# Altium PCB PCB.PcbDoc
Units mil, origin at the board's own origin, x right, y up, seen from the top; angles counter-clockwise.
Board outline 2838.9 x 750 mil, 2 copper layers (Top Layer, Bottom Layer), stack 55.118 mil thick; 18 components, 20 nets, 97 pads, 46 vias.
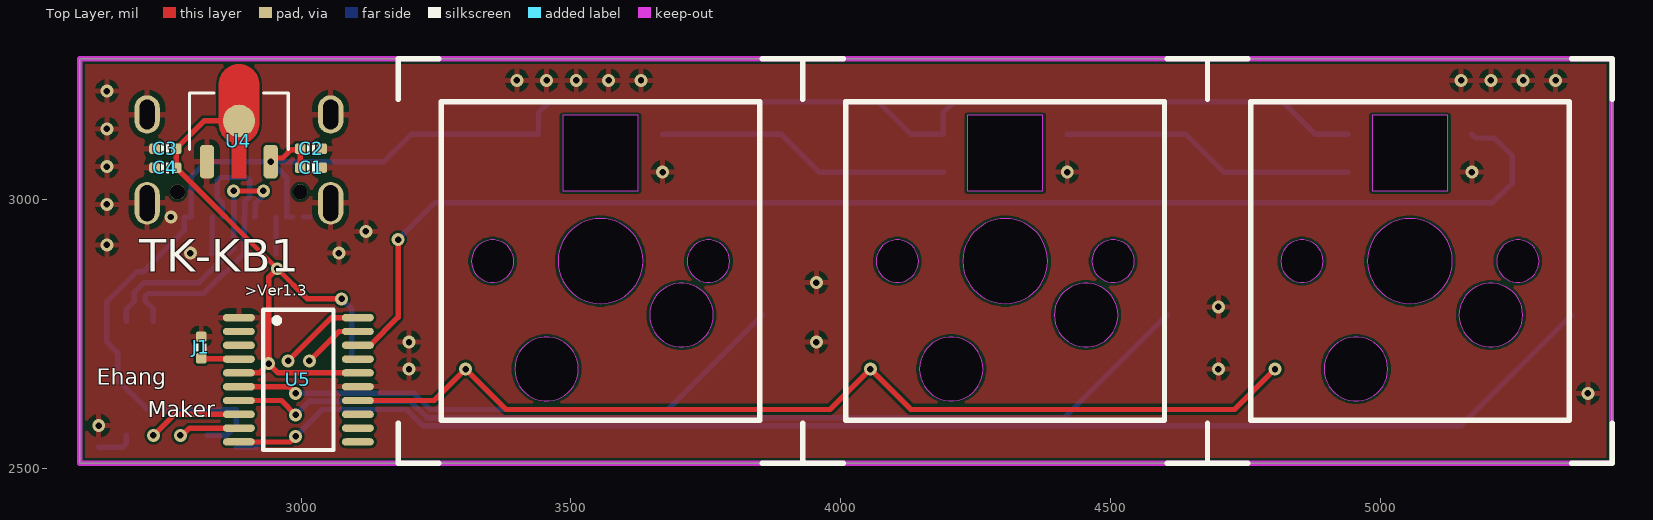
[diagram p0: Top Layer view]
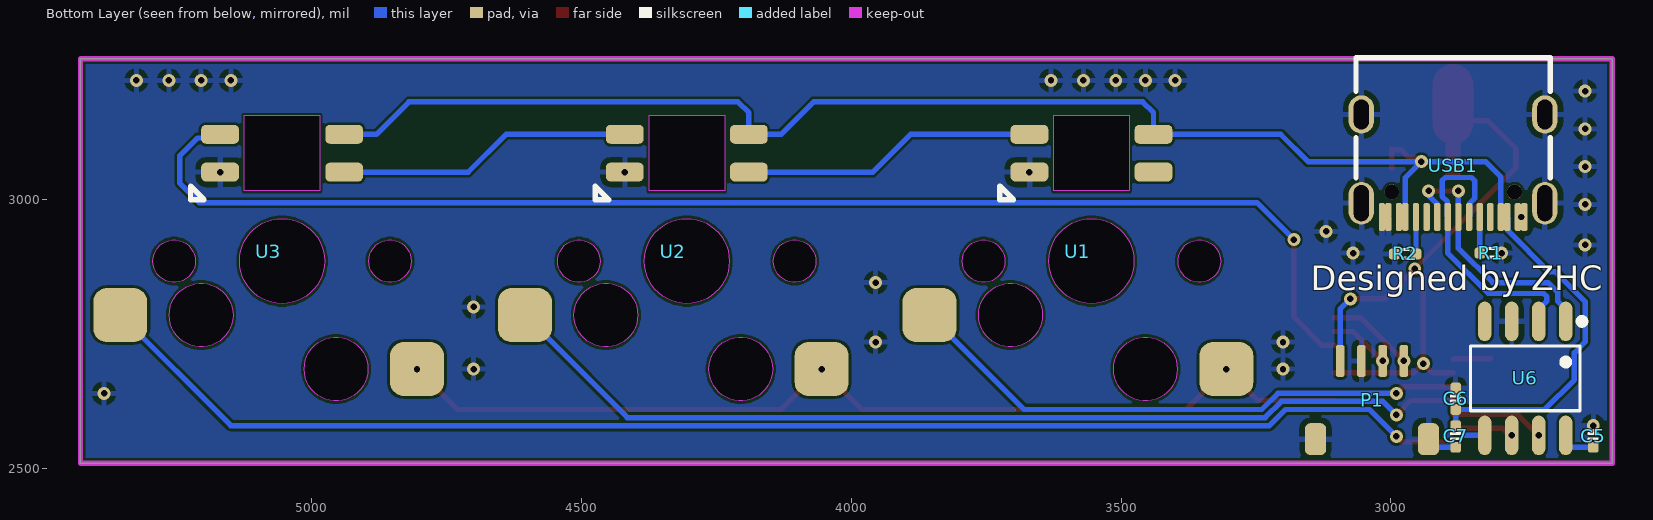
[diagram p1: Bottom Layer view, seen from below]
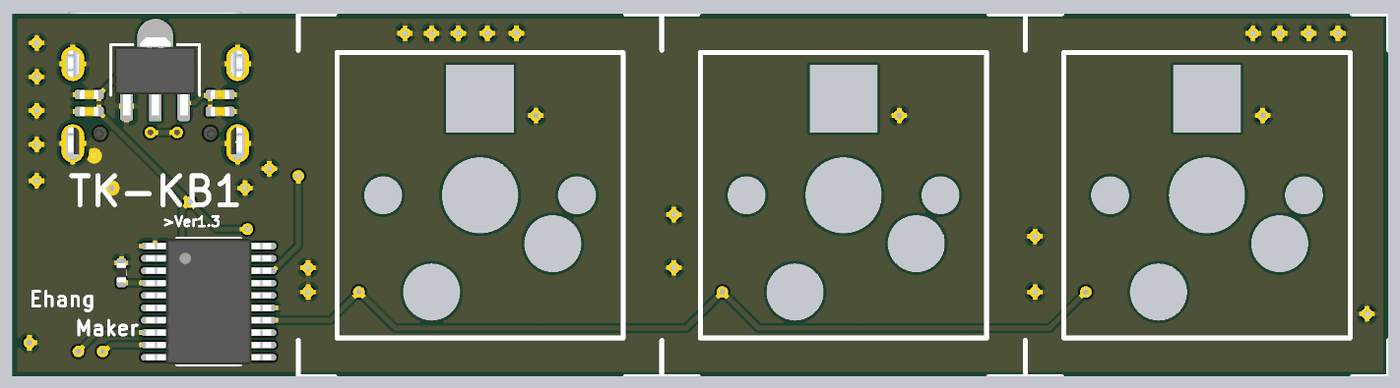
[diagram p2: 3D render of the assembled board from above, using the file's embedded part models]
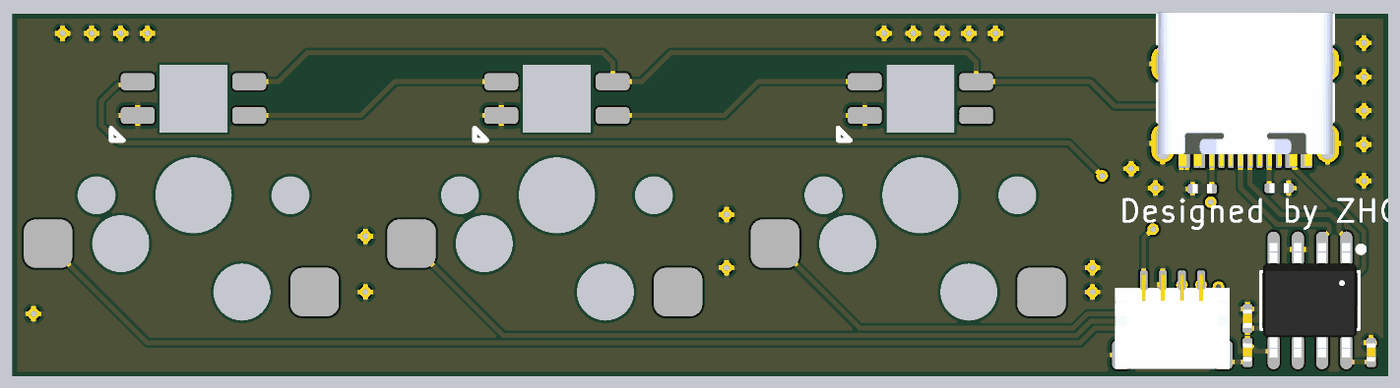
[diagram p3: 3D render of the assembled board from below, using the file's embedded part models]

## Layer stack, top to bottom
Top Solder: solder mask 3.937, Solder Resist, Dk 3.5
Top Layer: signal copper 7.874
Dielectric 1: dielectric 39.3701, FR-4, Dk 4.8
Bottom Layer: signal copper 7.874
Bottom Solder: solder mask 3.937, Solder Resist, Dk 3.5

## Board outline
2589.85,2810 2589.85,3260.15 5428.75,3260.15 5428.75,2510.15 2589.85,2510.15

## Design rules (kind name [scope] priority, off if disabled: settings)
Clearance [All] p1: gap=5 ignorepadtopadclearanceinfootprint=FALSE
DiffPairsRouting [All] p1: maxlimit=10 minlimit=5 mostfreqgap=10 toplayer_minwidth=5 toplayer_maxwidth=15 toplayer_prefwidth=15 bottomlayer_minwidth=5 bottomlayer_maxwidth=15 bottomlayer_prefwidth=15 maxuncoupledlength=500
HoleToHoleClearance [All] p1: gap=5 allowstackedmicrovias=TRUE
MinimumSolderMaskSliver [All] p1: minsoldermaskwidth=5
PolygonConnect [All] p1: connectstyle=Relief reliefconductorwidth=10 reliefentries=4 polygonreliefangle="90 Angle" airgapwidth=10
RoutingVias [All] p1: holewidth=12 width=24 viastyle="Through Hole" minholewidth=12 minwidth=24 maxholewidth=28 maxwidth=50
SilkToSilkClearance [All] p1: silktosilkclearance=5
SilkToSolderMaskClearance [IsPad] p1: minsilkscreentomaskgap=5 clearancetoexposedcopper=TRUE
SolderMaskExpansion [All] p1: expansion=4 istentingtop=FALSE
Width PWR [All] p1: maxlimit=10 minlimit=10 preferedwidth=10
Width [All] p2: maxlimit=10 minlimit=5 preferedwidth=5 minimp=50.000000 maximp=50.000000 favimp=50.000000
25 further rules are at their usual default settings.

## Classes and differential pairs
differential pair USB: +USB_P -USB_N

## Components (designator, comment, footprint, x,y, rotation, side; value= is the part's Value field where it differs from the comment)
C1 "10uF" C0402 3018.48,3058.22 r0 top
C2 "100nF" C0402 3018.48,3093.22 r0 top
C3 "100nF" C0402 2748.48,3093.22 r0 top
C4 "10uF" C0402 2748.48,3058.22 r0 top
C5 "100nF" C0402 2625,2560 r90 bottom
C6 "10uF" C0402 2880,2630 r90 bottom
C7 "100nF" C0402 2880,2560 r270 bottom
J1 "Jumper" R0402 2815,2725 r90 top
P1 "SH1.0-4P" SH1.0-4P 3035,2700 r180 bottom
R1 "5.1KΩ" R0402 2815,2900 r0 bottom
R2 "5.1KΩ" R0402 2973.48,2898.22 r0 bottom
U1 "KaiHua BOX" 凯华轴座+3528反贴灯 3555,2885 r0 top
U2 "KaiHua BOX" 凯华轴座+3528反贴灯 4305,2885 r0 top
U3 "KaiHua BOX" 凯华轴座+3528反贴灯 5055,2885 r0 top
U4 "AMS1117-3.3" SOT-89 2883.03,3145 r270 top
U5 "STM32F030F6/STM32F042F6" TSSOP-20 2995,2665 r0 top
U6 "CH340N" SOP-8 2750,2665 r0 bottom
USB1 "TYPE-C-16P" "TYPE-C-KH Female_LieDown_16P" 2886.16,3116.85 r0 bottom

## Footprints (in the part's own frame and the unit in brackets; to place one, negate y for a bottom-side part, rotate by r counter-clockwise, add the part's x,y. Pads: shape width x height; smd on the part's side, far side on the other; paste and mask are expansions set on the pad)
C0402 [mil] "电容-0402"
  rrect50% 20x20 smd: 1(-20,0) 2(20,0)
  silkscreen extent -6,-9 6,9, body extent -20,-10 20,10, height 20
R0402 [mil] "电阻-0402"
  rrect50% 20x20 smd: 1(-20,0) 2(20,0)
  silkscreen extent -7,-10 7,10, body extent -20,-10 20,10, height 14
SH1.0-4P [mm]
  rrect50% 0.4x1.5 smd: 1(-1.5,0) 2(-0.5,0) 3(0.5,0) 4(1.5,0)
  rrect50% 1x1.5 smd: SH1(-2.659,-3.683) SH2(2.659,-3.683)
  body extent -3,-4.42 3,0.54, height 3.14
SOP-8 [mm]
  oval 0.63x1.865 smd: 1(-1.877,-2.751) 2(-0.607,-2.751) 3(0.663,-2.751) 4(1.933,-2.751) 5(1.933,2.614) 6(0.663,2.614) 7(-0.607,2.614) 8(-1.877,2.614)
  silkscreen extent -2.79,-2.9 2.6,1.45, body extent -2.41,-3.08 2.49,2.92, height 1.5
SOT-89 [mm]
  rrect50% 1.575x0.672 smd paste+0 mask+0.051: 1(1.922,-1.46) 3(1.922,1.54)
  round 1.524 smd: 2(0,0.05)
  Top Layer region: -1.717,0.999 0.137,0.999 0.181,0.998 0.226,0.995 0.27,0.989 0.314,0.982 0.358,0.973 0.401,0.962 0.443,0.948 0.485,0.933 0.526,0.916 0.566,0.896 0.605,0.875 0.644,0.852 0.681,0.828 0.717,0.801 0.751,0.773 0.785,0.744 0.817,0.713 0.847,0.68 0.876,0.646 0.903,0.611 0.928,0.574 0.952,0.537 0.974,0.498 0.994,0.458 1.012,0.379 2.71,0.379 2.71,-0.281 1.012,-0.281 0.994,-0.36 0.974,-0.4 0.952,-0.439 0.928,-0.477 0.903,-0.513 0.876,-0.548 0.847,-0.582 0.817,-0.615 0.785,-0.646 0.751,-0.676 0.717,-0.704 0.681,-0.73 0.644,-0.755 0.605,-0.778 0.566,-0.799 0.526,-0.818 0.485,-0.835 0.443,-0.85 0.401,-0.864 0.358,-0.875 0.314,-0.884 0.27,-0.892 0.226,-0.897 0.181,-0.9 0.137,-0.901 -1.717,-0.901 -1.762,-0.9 -1.806,-0.897 -1.85,-0.892 -1.894,-0.884 -1.938,-0.875 -1.981,-0.864 -2.024,-0.85 -2.065,-0.835 -2.106,-0.818 -2.147,-0.799 -2.186,-0.778 -2.224,-0.755 -2.261,-0.73 -2.297,-0.704 -2.332,-0.676 -2.365,-0.646 -2.397,-0.615 -2.427,-0.582 -2.456,-0.548 -2.483,-0.513 -2.509,-0.477 -2.532,-0.439 -2.554,-0.4 -2.575,-0.36 -2.593,-0.32 -2.609,-0.278 -2.623,-0.236 -2.636,-0.193 -2.646,-0.15 -2.655,-0.106 -2.661,-0.062 -2.665,-0.018 -2.667,0.027 -2.667,0.071 -2.665,0.116 -2.661,0.16 -2.655,0.204 -2.646,0.248 -2.636,0.291 -2.623,0.334 -2.609,0.376 -2.593,0.418 -2.575,0.458 -2.554,0.498 -2.532,0.537 -2.509,0.574 -2.483,0.611 -2.456,0.646 -2.427,0.68 -2.397,0.713 -2.365,0.744 -2.332,0.773 -2.297,0.801 -2.261,0.828 -2.224,0.852 -2.186,0.875 -2.147,0.896 -2.106,0.916 -2.065,0.933 -2.024,0.948 -1.981,0.962 -1.938,0.973 -1.894,0.982 -1.85,0.989 -1.806,0.995 -1.762,0.998 -1.717,0.999
  silkscreen extent -1.31,-2.29 1.35,2.37, body extent -1.7,-2.1 2.4,2.2, height 1.64
TSSOP-20 [mm]
  oval 1.5x0.35 smd: 1(-2.8,2.925) 2(-2.8,2.275) 3(-2.8,1.625) 4(-2.8,0.975) 5(-2.8,0.325) 6(-2.8,-0.325) 7(-2.8,-0.975) 8(-2.8,-1.625) 9(-2.8,-2.275) 10(-2.8,-2.925) 11(2.8,-2.925) 12(2.8,-2.275) 13(2.8,-1.625) 14(2.8,-0.975) 15(2.8,-0.325) 16(2.8,0.325) 17(2.8,0.975) 18(2.8,1.625) 19(2.8,2.275) 20(2.8,2.925)
  silkscreen extent -1.65,-3.3 1.65,3.3, body extent -3.27,-3.3 3.27,3.3, height 1.2
"TYPE-C-KH Female_LieDown_16P" [mm] "Type-C母座_卧贴_16P"
  oval 1.2x2 hole 0.7 slot 1.7 at 90 deg: 1(-4.357,3.162) 2(4.283,3.162)
  oval 1.2x1.8 hole 0.7 slot 1.4 at 90 deg: 3(-4.357,-1.018) 4(4.283,-1.018)
  rrect50% 0.3x1.3 smd: A1(-3.387,3.812) A4(-2.587,3.812) A5(-1.287,3.812) A6(-0.287,3.812) A7(0.213,3.812) A8(1.213,3.812) A9(2.513,3.812) A12(3.313,3.812) B1(3.013,3.812) B4(2.213,3.812) B5(1.713,3.812) B6(0.713,3.812) B7(-0.787,3.812) B8(-1.787,3.812) B9(-2.287,3.812) B12(-3.087,3.812)
  round 0.7 hole 0.7 unplated: ""(-2.927,2.632) ""(2.853,2.632)
  silkscreen extent -4.61,-3.68 4.53,1.97, body extent -4.62,-3.73 4.52,4.36, height 3.32
凯华轴座+3528反贴灯 [mil]
  rrect50% 70x35 smd far side paste+0 mask+4: 1(-115,235) 2(-115,165) 5(115,165) 6(115,235)
  rrect50% 100x100 smd far side paste+0 mask+4: 3(-250,-200) 4(300,-100)
  Keep-Out Layer board cut-out: 78.74,0 70.94,34.16 49.09,61.56 17.52,76.76 -17.52,76.76 -49.09,61.56 -70.94,34.16 -78.74,0 -78.74,0 -70.94,-34.17 -49.09,-61.56 -17.52,-76.77 17.52,-76.77 49.09,-61.56 70.94,-34.17 78.74,0
  Keep-Out Layer board cut-out: 239.37,0 235.47,17.08 224.55,30.78 208.76,38.38 191.24,38.38 175.45,30.78 164.53,17.08 160.63,0 160.63,0 164.53,-17.08 175.45,-30.78 191.24,-38.38 208.76,-38.38 224.55,-30.78 235.47,-17.08 239.37,0
  Keep-Out Layer board cut-out: -160.63,0 -164.53,17.08 -175.45,30.78 -191.24,38.38 -208.76,38.38 -224.55,30.78 -235.47,17.08 -239.37,0 -239.37,0 -235.47,-17.08 -224.55,-30.78 -208.76,-38.38 -191.24,-38.38 -175.45,-30.78 -164.53,-17.08 -160.63,0
  Keep-Out Layer board cut-out: -40.94,-200 -46.79,-174.38 -63.18,-153.83 -86.86,-142.43 -113.14,-142.43 -136.82,-153.83 -153.21,-174.38 -159.05,-200 -159.05,-200 -153.21,-225.62 -136.82,-246.17 -113.14,-257.58 -86.86,-257.58 -63.18,-246.17 -46.79,-225.62 -40.94,-200
  Keep-Out Layer board cut-out: 209.06,-100 203.21,-74.38 186.82,-53.83 163.14,-42.43 136.86,-42.43 113.18,-53.83 96.79,-74.38 90.95,-100 90.95,-100 96.79,-125.62 113.18,-146.17 136.86,-157.58 163.14,-157.58 186.82,-146.17 203.21,-125.62 209.06,-100
  Keep-Out Layer board cut-out: 70,270 -70,270 -70,130 70,130 70,270
  silkscreen extent -375,-375 375,375, body extent -285,-308 285,306, height 629

## Part data
C1 C2 C3 C4 C5 C6 C7: library part C0402, "电容-0402"
J1: "飞线，0Ω电阻"
P1: "SH1.00mm 4P 卧贴"
R1 R2: library part R0402, "电阻-0402"
U1 U2 U3: "凯华轴座+3528反贴灯，缺口在右下"
U4: library part "AMS1117-3.3 89", "电源IC 降压IC 线性稳压LDO SOT-89封装"
U5: library part STM32F030F4P6, "ARM Cortex-M0 32-bit MCU, 16 KB Flash, 4 KB Internal RAM, 15 I/Os, 20-pin TSSOP, -40 to 85 degC, Tube", I/Os (High Current)=15, Operating Frequency(F) (Processor speed) (MHz)=48, Supplier Part Number 1=497-14044-5-ND, Supply Voltage(Vcc) min (V)=2.4, ComponentLink1Description="Manufacturer URL", ComponentLink1URL=http://www.st.com/web/en/home.html, ComponentLink2Description=Datasheet, ComponentLink2URL=http://www.st.com/st-web-ui/static/active/en/resource/technical/document/datasheet/DM00088500.pdf, ComponentLink3Description="Package Specification", ComponentLink3URL=http://www.st.com/st-web-ui/static/active/en/resource/technical/document/datasheet/DM00065136.pdf, Core="ARM Cortex-M0", DatasheetVersion="Rev. 1", FLASH Size (Prog) (kB)=16, Internal RAM Size (kB)=4, Mounting Technology="Surface Mount", PackageDescription="20-Pin Thin Shrink Small Outline Package, 6.5 x 4.4 mm Body, 0.65 mm Pitch", PackageReference=TSSOP20, PackageVersion="Rev. 1, 11/2012", Packing=Tube, PartNumber=STM32F030F4P6, Supplier 1=Digi-Key, Supplier 2=Newark, Supplier 3=Mouser, Supplier Part Number 2=06X3648, Supplier Part Number 3=511-STM32F030F4P6
U6: "CH340N通讯芯片"
USB1: library part "TYPE-C-KH Female_LieDown_16P", "Type-C母座_卧贴_16P"

## Via types
v1: diameter 24, hole 12, Top Layer to Bottom Layer, 46 vias

## Nets (pads, with @x,y where several pads share a name; then routed paths per layer and width w, separated by ;. In a path a pad name is that pad's centre, name@x,y a point inside that pad or via, vN(x,y) a via of type N, cw(c..) or ccw(c..) an arc to the next point about the centre after c; other vN are vias at no path point)
3.3V: C3.2 C4.2 P1.1 U4.2 U5.5 U5.16 | length 1120.3
  Top Layer w10: U5.5 2922.8,2677.8 v1(2940,2695) ; U4.2 2820.26,3145 C3.2 C4.2 v1(2955.85,2870.85) ; v1(3075,2815) 3011.7,2815 v1(2955.85,2870.85) ; U5.16 2957.2,2677.8 v1(2940,2695) ; v1(2940,2695) 2940,2855 v1(2955.85,2870.85)
  Bottom Layer w10: v1(3075,2815) 3094.06,2795.94 P1.1
GND: C1.2 C2.2 C3.1 C4.1 C5.2 C6.2 C7.2 J1.2 P1.2 P1.SH1 P1.SH2 R1.1 R2.2 U1.5 U2.5 U3.5 U4.1 U5.1 U5.15 U6.3 USB1.1 USB1.2 USB1.3 USB1.4 USB1.A1 USB1.A12 USB1.B1 USB1.B12 | length 80.5
  Bottom Layer w10: USB1.A1 USB1.B12 ; C7.2 2916,2540 2930.31,2554.32 P1.SH2 ; USB1.B1 USB1.A12
  other v1: 2625,2580 5385,2640 3200,2685 4700,2685 3200,2735 3955,2735 4700,2800 3955,2845 2795,2900 3070,2900 2640,2915 3120,2940 2758.72,2966.76 2640,2990 3670,3050 4420,3050 5170,3050 2640,3060 2640,3130 2640,3200 3400,3220 3455,3220 3510,3220 3570,3220 3630,3220 5150,3220 5205,3220 5265,3220 5325,3220
NetC5_1: C5.1 U6.8 | length 69.2
  Bottom Layer w10: C5.1 2669.28,2540 2676.12,2546.84 U6.8
NetJ1_1: J1.1 U5.4 | length 70.4
  Top Layer w10: J1.1 2815.89,2704.11 2884.04,2704.11 U5.4
NetR1_2: R1.2 USB1.A5 | length 69.5
  Bottom Layer w10: R1.2@2833.48,2898.22 2833.71,2898.22 2835.49,2900 USB1.A5
NetR2_1: R2.1 USB1.B5 | length 68.6
  Bottom Layer w10: R2.1 2953.54,2898.28 2953.54,2966.7 USB1.B5
NetU1_6: U1.6 U2.2 | length 549
  Bottom Layer w10: U1.6 3890,3120 3960,3050 U2.2
NetU2_6: U2.6 U3.2 | length 549
  Bottom Layer w10: U2.6 4640,3120 4710,3050 U3.2
PA0: U1.4 U5.6 | length 1060.2
  Top Layer w10: U5.6 2977.8,2652.2 v1(2990,2640)
  Bottom Layer w10: v1(2990,2640) 3209.39,2640 3239.39,2610 3680,2610 U1.4
PA1: U2.4 U5.7 | length 1832.7
  Top Layer w10: U5.7 2963.39,2626.61 v1(2990,2600)
  Bottom Layer w10: v1(2990,2600) 3015,2625 3203.18,2625 3233.18,2595 4415,2595 U2.4
PA4: U3.4 U5.10 | length 2592.5
  Top Layer w10: U5.10 2979.84,2549.84 v1(2990,2560)
  Bottom Layer w10: v1(2990,2560) 3040,2610 3195,2610 3225,2580 5150,2580 U3.4
PA10: U3.6 U5.18 | length 2490.3
  Top Layer w10: U5.18 3127.87,2728.98 3180,2781.1 v1(3180,2925)
  Bottom Layer w10: v1(3180,2925) 3248.5,2993.5 5208.5,2993.5 5245,3030 5245,3080 5211.79,3113.21 5176.79,3113.21 U3.6
PB1: U1.3 U2.3 U3.3 U5.14 | length 1848.2
  Top Layer w10: U5.14 3246.61,2626.61 v1(3305,2685) 3380,2610 3980,2610 v1(4055,2685) 4130,2610 4730,2610 v1(4805,2685)
SWCLK: P1.4 U5.20 | length 162.5
  Top Layer w10: v1(2975.94,2700) 3056.1,2780.16 U5.20
SWDIO: P1.3 U5.19 | length 112.5
  Top Layer w10: v1(3015.31,2700) 3069.88,2754.57 U5.19
UART_RX: U5.9 U6.6 | length 114.2
  Top Layer w10: v1(2776.12,2562.07) 2779.91,2562.07 2793.27,2575.43 U5.9
UART_TX: U5.8 U6.7 | length 174.8
  Top Layer w10: v1(2726.12,2562.07) 2765.08,2601.02 U5.8
USB5V: C1.1 C2.1 C6.1 C7.1 U1.1 U2.1 U3.1 U4.3 U6.5 USB1.A4 USB1.A9 USB1.B4 USB1.B9 | length 3346.2
  Top Layer w10: v1(2943.67,3069.32) 2950.38,3076.04 2966.04,3076.04 2981.71,3091.71 2996.97,3091.71 C2.1 C1.1
  Bottom Layer w10: U6.5 2862.07,2562.07 C7.1 C6.1 2715,2610 2660,2665 2660,2715 2640,2735 2640,2810 2695,2865 2706.77,2865 2783.41,2941.64 2783.41,2965.85 USB1.A4 USB1.B9 2796.12,3041.12 2824.32,3069.32 v1(2943.67,3069.32) ; USB1.A9 USB1.B4 2973.28,3039.71 v1(2943.67,3069.32) ; U3.1 4880,3120 4820,3180 4210,3180 4190,3160 U2.1 4130,3120 4070,3180 3460,3180 3440,3160 U1.1 3204.21,3120 3153.53,3069.32 v1(2943.67,3069.32)
USB_N: U6.2 USB1.A7 USB1.B7 | length 544.1
  Bottom Layer w10: U6.2 2726.12,2795.86 2711.12,2810.86 2711.12,2819.14 2716.98,2825 2819.5,2825 2894.86,2900.36 2894.86,2966.44 USB1.A7 2895.45,2967.67 2895.45,2995.45 2905,3005 2905,3034.14 2899.14,3040 2850.86,3040 2845,3034.14 2845,3001.16 2854.27,2991.9 2854.27,2967.67 USB1.B7
USB_P: U6.1 USB1.A6 USB1.B6 | length 493.9
  Top Layer w10: v1(2875,3015) v1(2930,3015)
  Bottom Layer w10: U6.1 2676.12,2795.86 2691.12,2810.86 2691.12,2827.43 2708.69,2845 2811.21,2845 2874.86,2908.65 USB1.A6 2874.86,3014.86 v1(2875,3015) ; USB1.B6 2915.14,2967.67 2915.14,2991.91 2930,3006.77 v1(2930,3015)
pads on no net: U1.2 U5.2 U5.3 U5.11 U5.12 U5.13 U5.17 U6.4 USB1. USB1.A8 USB1.B8

## Polygon pours and split planes (outlines as drawn)
GND on Top Layer "GND_L01_P002" (solid, pour order 2): 5430,2510 5430,3260 2590,3260 2590,2510
GND on Bottom Layer "GND_L02_P001" (solid, remove dead copper, pour order 1): 2590,3260 2590,2510 5430,2510 5430,3260

## Keep-outs
Keep-Out Layer:
  lines w10: 2589.85,2510.15 2589.85,2810 2589.85,3085 2589.85,3260.15 5428.75,3260.15 5428.75,2510.15 2589.85,2510.15

## Silkscreen, mask and mechanical layers (free items; w line width, h text height)
Top Overlay:
  text "TK-KB1" at 2700,2865 h60
  text ">Ver1.3" at 2896,2821 h20
  text "Ehang" at 2621,2656 h30
  text "Maker" at 2716,2596 h30
Bottom Overlay:
  text "Designed by ZHC" at 3149,2831 h45